# EAGLE board M_D_ext_power-with_d (EAGLE 9.6.2)
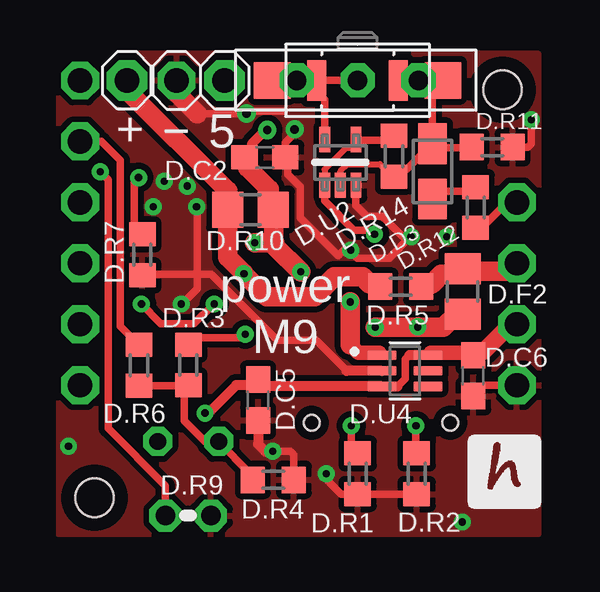
[diagram p0: board, top side]
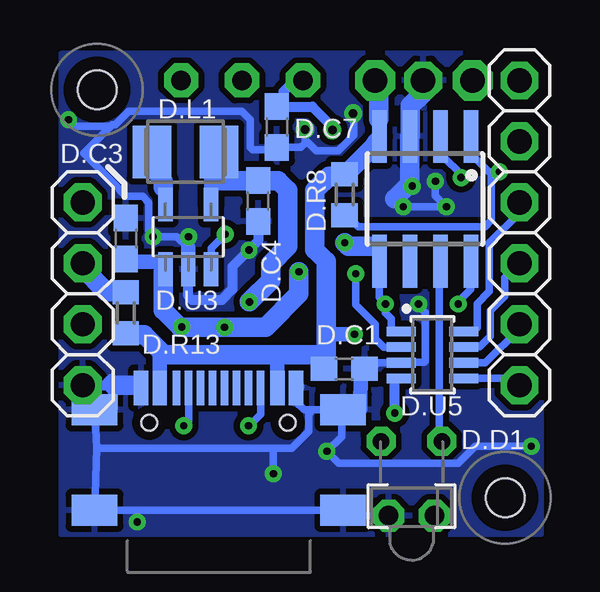
[diagram p1: board, bottom side, seen from below]

No outline drawn. Coordinates in mm, seen from the top.
Copper layers (1*16): Top 0.035mm / dielectric 1.5mm / Bottom 0.035mm
Design rules "default *": minimum track width 10mil, minimum drill 0.3mm, track to track 6mil, track to pad 6mil, pad to pad 6mil, via to via 10mil, smd to smd 10mil, copper to edge 15mil, drill to drill 15mil, minimum pad ring 10mil, minimum via ring 8mil, stop-mask expansion 4mil, vias tented up to drill 14mil, thermal gap 10mil
Holes 1.6 mm at 2,2 19,19
tRestrict: area 18,18 to 20,20; area 1,1 to 3,3
bRestrict: area 1,1 to 3,3; area 18,18 to 20,20

## Footprints (pad centres in the part's own frame; a part is rotated, then mirrored left to right if it is on the bottom)
C0603 = smd 1.1 x 1: 1 -0.85,0; 2 0.85,0
LED_1.8 = drill 0.7 octagon: 1 -1.27,-0.4; 2 1.27,-0.4
SHOTKY_2.8 = smd 1.7 x 1.2: A -1.15,0; K 1.15,0
R0805 = smd 1.3 x 1.5: 1 -0.95,0; 2 0.95,0
1X06 = drill 1.016 pad 1.575 octagon: 1 -6.35,0; 2 -3.81,0; 3 -1.27,0; 4 1.27,0; 5 3.81,0; 6 6.35,0
1X04 = drill 1.016 pad 1.575 octagon: 1 -3.81,0; 2 -1.27,0; 3 1.27,0; 4 3.81,0
L3230M = smd 1.6 x 2.2: 1 -1.4,0; 2 1.4,0
1X-03-2 = drill 1.016 pad 1.676 octagon: 1 -2.016,0; 3 2.048,0 | drill 1.016 pad 1.575 octagon: 2 -0.016,0
SWITCH = drill 0.8 pad 1.422 octagon: P$1 2.54,0; P$2 0,0; P$3 -2.54,0 | smd 0.8 x 1.7: P$4 -1.7,0; P$5 1.7,0 | smd 1.524 x 1.524: P$6 -3.556,0; P$7 3.556,0
R0603 = smd 1 x 1.1: 1 -0.85,0; 2 0.85,0
THERM = drill 0.813 octagon: 1 -0.953,0; 2 0.953,0
SOP8 = smd 0.6 x 2.2: 1 -1.905,-2.6; 2 -0.635,-2.6; 3 0.635,-2.6; 4 1.905,-2.6; 5 1.905,2.6; 6 0.635,2.6; 7 -0.635,2.6; 8 -1.905,2.6
DCK0005A_M = smd 1.05 x 0.45: 1 -0.95,0.65; 2 -0.95,0; 3 -0.95,-0.65; 4 0.95,-0.65; 5 0.95,0.65
SOT32-5 = smd 0.6 x 1.4: BP 0.95,1.35; GND 0,-1.35; SHDN 0.95,-1.35; VIN -0.95,-1.35; VOUT -0.95,1.35
SOT65P210X110-6N = smd 1.19 x 0.4: 1 -0.96,0.65; 2 -0.96,0; 3 -0.96,-0.65; 4 0.96,-0.65; 5 0.96,0; 6 0.96,0.65
SOT23-8 = smd 0.4 x 1.2: 1 -0.975,-1.3; 2 -0.325,-1.3; 3 0.325,-1.3; 4 0.975,-1.3; 5 0.975,1.3; 6 0.325,1.3; 7 -0.325,1.3; 8 -0.975,1.3
USB-C = smd 0.6 x 1.45: A1B12 -3.235,3.825; A4B9 -2.46,3.825; B1A12 3.215,3.825; B4A9 2.44,3.825 | smd 0.3 x 1.45: A5 -1.26,3.825; A6 -0.26,3.825; A7 0.24,3.825; A8 1.24,3.825; B5 1.74,3.825; B6 0.74,3.825; B7 -0.76,3.825; B8 -1.76,3.825 | smd 1.9 x 1.3: SH1 -5.18,2.91; SH2 -5.18,-1.27; SH3 5.18,-1.27; SH4 5.18,2.91 | hole 0.65: 2.88,2.38; -2.9,2.38

## Placement (x,y rotation side)
D.C1  4u7  [C0603]  8.7,7.38 180 bottom
D.C2  4u7  [C0603]  9.1,16.18 180 top
D.C3  4u7  [C0603]  17.81,12.8 270 bottom
D.C4  10u  [C0603]  12.29,14.36 90 bottom
D.C5  100n  [C0603]  8.81,6.07 90 top
D.C6  100n  [C0603]  17.78,7.09 90 top
D.C7  100n  [C0603]  11.51,17.45 90 bottom
D.D1  LED_1.8  [LED_1.8]  5.9,3.95 180 bottom
D.D3  SHOTKY_2.8 or another diode  [SHOTKY_2.8]  16.08,15.6 90 top
D.F2  1.1A  [R0805]  17.34,10.6 90 top
D.J2  [1X06]  1.4,13.04 90 bottom
D.J3  [1X04]  19.6,10.5 270 bottom
D.L1  2u2  [L3230M]  15.32,16.41 0 bottom
D.LIPOL  PINHEAD-1X3-2  [1X-03-2]  5.4,19.39 180 top
D.ON/OFF/RESET  SWITCH  [SWITCH]  12.96,19.39 0 top
D.R1  5k1  [R0603]  12.96,3 270 top
D.R2  5k1  [R0603]  15.42,3 270 top
D.R3  3k3  [R0603]  5.91,7.54 90 top
D.R4  5k1  [R0603]  9.45,2.74 180 top
D.R5  0R  [R0603]  14.76,10.79 0 top
D.R6  10k  [R0603]  3.85,7.52 90 top
D.R7  I=1800/R  [R0603]  4,12.12 90 top
D.R8  10k  [R0603]  8.69,14.63 90 bottom
D.R9  TERM_10K  [THERM]  5.9,1.25 180 top
D.R10  0.1  [R0805]  8.5,14 180 top
D.R11  390k  [R0603]  18.57,16.61 0 top
D.R12  100k  [R0603]  17.88,14.1 90 top
D.R13  0R  [R0603]  17.81,9.7 90 bottom
D.R14  0R  [R0603]  14.48,16.23 90 top
D.U1  CN3083  [SOP8]  5.33,14.45 180 bottom
D.U2  SN74AUP1G80  [DCK0005A_M]  12.24,15.98 90 top
D.U3  LM3671_3.3  [SOT32-5]  15.2,12.87 0 bottom
D.U4  LM66100DCKR  [SOT65P210X110-6N]  14.94,7.29 0 top
D.U5  [SOT23-8]  5.03,7.95 270 bottom
U$1  USB-C  [USB-C]  13.93,2.75 0 bottom

## Library data of the parts
D.C1-D.C7 = rcl; SPICEPREFIX: C
D.D1 D.D3 D.ON/OFF/RESET D.R9 D.U1 D.U5 U$1 = hugo
D.F2 D.R1-D.R8 D.R10-D.R14 = rcl; SPICEPREFIX: R
D.J2 D.J3 D.LIPOL = pinhead2
D.L1 = rcl; SPICEPREFIX: L
D.U2 = SN74AUP1G80DCKR; COPYRIGHT: Copyright (C) 2026 Ultra Librarian. All rights reserved.; DATASHEET: https://www.ti.com/lit/gpn/sn74aup1g80; DESCRIPTION: Low-Power Single Postitive-Edge-Triggered D-Type Flip-Flop 5-SC70 -40 to 85; MANUFACTURER_NAME: Texas Instruments; MANUFACTURER_PART_NUMBER: SN74AUP1G80DCKR; REFDES: RefDes; TYPE: TYPE
D.U3 = !stavebnice03
D.U4 = LM66100DCKR; AVAILABILITY: In Stock; CHECK_PRICES: https://www.snapeda.com/parts/LM66100DCKR/Texas+Instruments/view-part/?ref=eda; DESCRIPTION: 1.5-V to 5.5-V, 1.5-A, 0.5-µA IQ ideal diode with integrated FET; MF: Texas Instruments; MP: LM66100DCKR; PACKAGE: SOT-SC70-6 Texas Instruments; PRICE: None; SNAPEDA_LINK: https://www.snapeda.com/parts/LM66100DCKR/Texas+Instruments/view-part/?ref=snap

## Nets
5V: D.C1.2 D.LIPOL.1 D.R3.2 D.R8.2 D.R13.1 D.U1.4 U$1.A4B9 U$1.B4A9
CHRG: D.D1.2 D.R3.1 D.R4.2 D.R6.1
GND: D.C1.1 D.C2.1 D.C3.1 D.C4.1 D.C5.1 D.C6.1 D.C7.1 D.J3.4 D.LIPOL.2 D.R1.2 D.R2.2 D.R4.1 D.R7.1 D.R9.1 D.R11.2 D.U1.3 D.U2.3 D.U3.GND D.U4.2 D.U5.3 U$1.A1B12 U$1.B1A12 U$1.SH1 U$1.SH2 U$1.SH3 U$1.SH4
IN+: D.C2.2 D.C3.2 D.C7.2 D.F2.1 D.ON/OFF/RESET.P$2 D.ON/OFF/RESET.P$3 D.ON/OFF/RESET.P$4 D.ON/OFF/RESET.P$6 D.R10.1 D.U1.5 D.U1.8 D.U2.5 D.U3.VIN D.U5.1
IN-: D.LIPOL.3 D.R5.1 D.R10.2 D.U5.2
N$2: D.L1.1 D.U3.VOUT
N$3: D.D1.1 D.U1.7
N$4: D.R1.1 U$1.B5
N$5: D.D3.A D.R12.2
N$6: D.R2.1 U$1.A5
N$7: D.R7.2 D.U1.2
N$8: D.R8.1 D.R9.2 D.U1.1
N$9: D.R14.2 D.U2.1 D.U2.4 D.U3.SHDN
N$10: D.D3.K D.ON/OFF/RESET.P$1 D.ON/OFF/RESET.P$5 D.ON/OFF/RESET.P$7 D.R11.1 D.R14.1 D.U2.2
PA1: D.J2.3 D.U5.7
PA2: D.J2.4 D.U5.8
PA3: D.J2.5 D.R6.2
PA5-1: D.J3.1 D.R12.1
SCL: D.J2.1 D.U5.5
SDA: D.J2.2 D.U5.6
VCC: D.C5.2 D.C6.2 D.J3.3 D.U4.3 D.U4.6 D.U5.4
VCC1: D.C4.2 D.L1.2 D.U3.BP D.U4.1
VOPT: D.F2.2 D.J3.2 D.R5.2 D.R13.2

## Tracks (layer width: path | path; a pad name or v marks a point on that pad's centre or on a via)
5V  (via drill 0.3)
  Top 0.305: D.R3.2 6.19,8.66 8.13,8.66 v8.28,8.81
  Bottom 0.254: 16.28,7.96 16.2,7.96
  Bottom 0.305: 9.4,8.81 9.45,8.76
  Bottom 0.61: 11.49,7.02 U$1.B4A9 11.49,7.87 11.4,7.96 | D.R8.2 8.79,15.48 8.87,15.4 | U$1.A4B9 16.39,7.84 16.28,7.96 | 7.26,17.76 7.24,17.74 D.U1.4 7.44,16.85 7.44,16.67 | v8.28,8.81 9.4,8.81
  Bottom 0.813: D.R8.2 8.63,15.48 7.44,16.67 | 8.87,15.4 9.34,15.4 9.93,14.81 9.93,12.32 9.45,11.84 9.45,8.76 9.45,7.97 9.46,7.96 9.65,7.96 | D.C1.2 9.64,7.46 9.65,7.96 | 9.65,7.96 11.4,7.96 16.2,7.96 17.04,8.8 17.75,8.8 D.R13.1 | 7.26,17.76 7.26,19.21 D.LIPOL.1
CHRG
  Top 0.305: D.R4.2 8.6,2.9 7.05,4.45 7.05,4.35 D.D1.2 7.16,4.34 6.61,4.34 5.74,5.2 5.74,6.59 | D.R6.1 5.69,6.67 5.69,6.59 5.74,6.59 | 5.74,6.59 5.82,6.59 D.R3.1
  Bottom 0.305: D.D1.2
GND  (via drill 0.3, 0.35)
  Top 0.305: v11.65,3 11.65,2.77 12.27,2.15 D.R1.2 D.R2.2 | 6.29,11.3 6.29,10.71 5.65,10.07 v5.61,10.07 | 6.29,11.3 6.29,14.12 v6.25,14.12 | v10.34,17.35 10.34,17.18 9.95,16.79 D.C2.1 | D.C2.1 10.05,16.08 10.05,15.47 10.57,14.96 10.57,13.66 12.15,12.08 12.51,12.44 12.65,12.3 | v15.19,12.88 15.16,12.88 14.28,11.99 12.95,11.99 12.65,12.3 | 6.27,18.01 v8.33,18.01 8.43,18.11 9.91,18.11 | v9.42,3.94 10.15,3.94 10.3,3.79 D.R4.1 | D.R7.1 4.03,11.3 6.29,11.3 | v12.67,12.32 12.65,12.3 | 12.5,7.29 11.23,8.56 9.6,8.56 6.86,11.3 6.29,11.3 | D.C6.1 18.23,6.69 D.J3.4 | 15.11,12.88 v15.19,12.88 | v20.19,17.75 20.19,16.75 20.05,16.61 D.R11.2 | v15.19,12.88 15.19,13.01 | D.C2.1 10.08,16.05 | v15.19,12.88 14.84,12.88 13.98,13.74 13.34,13.74 12.89,14.18 D.U2.3
  Top 0.406: D.C5.1 8.81,4.23 9.11,3.94 v9.42,3.94 | D.U4.2 12.5,7.29
  Top 0.61: 5.44,18.84 5.42,18.89 D.LIPOL.2
  Top 0.813: 6.27,18.01 5.44,18.84
  Bottom 0.305: 11.65,4.07 18.99,4.07 19.01,4.09 | U$1.SH4 8.92,5.71 9.45,5.71 9.33,5.59 8.81,5.59 | U$1.SH1 19.01,4.09 | 19.01,4.09 U$1.SH2 U$1.SH3 8.64,1.25 D.R9.1 | 11.65,3.13 v11.65,3 | v11.65,3 11.63,2.97 | v11.65,3 11.65,4.07 | 8.04,5.68 8.13,5.59 8.81,5.59 | 8.01,7.22 D.C1.1 7.55,7.38 7.3,7.62 D.U5.3 6.31,7.64 5.37,7.64 5.32,7.7 5.32,9.73 5.65,10.06 5.65,10.07 v5.61,10.07 | 6.59,14.46 v6.25,14.12 v4.45,14.12 4.9,14.58 v4.9,15.19 | U$1.B1A12 10.71,6.01 10.37,5.66 U$1.SH4 | 11.65,4.07 10.89,4.07 10.19,4.78 10.19,5.49 10.02,5.66 U$1.SH4 | 18.44,17.48 19.91,17.48 v20.19,17.75 | 15.2,12.41 15.68,12.88 16.59,12.88 16.82,13.12 16.84,13.12 16.84,14.3 17.11,14.57 17.8,14.57 18.06,14.82 18.06,14.86 19.56,16.36 18.44,17.48 | v0.91,4.14 3.24,4.14 3.95,3.44 8.93,3.44 v9.42,3.94 8.81,4.55 8.81,5.59 | 18.44,17.48 18.36,17.55 18.24,17.55 17.68,18.11 12.98,18.11 12.62,17.75 12.62,16.61 12.52,16.51 11.6,16.51 D.C7.1 10.51,16.6 10.34,16.77 | 10.46,17.48 v10.34,17.35 10.34,16.77 | v8.33,18.01 8.31,17.99 8.31,17.1 8.95,16.46 9.88,16.46 10.26,16.85 10.34,16.77
  Bottom 0.406: 18.37,6.98 18.5,6.85 | 18.5,6.85 18.66,6.69 | U$1.A1B12 17.16,6.6 17.33,6.77 17.41,6.69 | 18.66,6.69 D.J3.4 19.6,6.25 | 18.66,6.69 18.31,6.69 | 18.5,6.85 18.34,6.68 18.34,5.71 | D.C4.1 12.29,12.71 v12.67,12.32 13.36,11.63 13.36,10.68 13.8,10.24 15.04,10.24 15.2,10.4 D.U3.GND
  Bottom 0.61: 8.81,5.84 8.87,5.79 U$1.SH4 8.74,5.79 | 19.6,6.25 U$1.SH1 | U$1.B1A12 10.66,6.63 | D.U1.3 5.97,18.23 | 8.04,5.68 8.01,7.22 | D.U3.GND 15.2,12.41 | D.LIPOL.2 5.42,18.86
  Bottom 0.813: 18.31,6.69 17.41,6.69 | 6.59,14.46 5.97,15.09 D.U1.3 5.94,17.08 5.94,18.33 5.42,18.86
  other vias: 5.87,14.99 16.67,12.88 17.32,0.99
  pour Top (isolate 0.254): 0.5,20.5 0.5,0.5 20.5,0.5 20.5,20.5
  pour Bottom (isolate 0.254, rank 3): 0.5,20.5 20.5,20.5 20.5,0.5 0.5,0.5
IN+  (via drill 0.3, 0.35)
  Top 0.305: v3.96,10.07 4.77,9.26 6.13,9.26 v6.99,10.07 | v9.2,17.33 9.13,17.33 | 8.55,16.49 D.C2.2 | 11.32,19.33 D.ON/OFF/RESET.P$4 D.ON/OFF/RESET.P$3 D.ON/OFF/RESET.P$6 | D.ON/OFF/RESET.P$2 11.39,19.39 11.32,19.33 | 11.32,19.33 11.08,19.09 11.59,18.57 D.U2.5
  Top 0.406: 9.13,17.33 8.55,16.74 8.55,16.49
  Top 0.508: 14.79,9.1 15.32,9.1
  Top 0.61: v8.68,12.62 9.52,12.62
  Top 0.813: D.R10.1 9.27,14.18 9.27,14.86 8.38,15.75 8.38,16.06 D.C2.2 | D.R10.1 9.54,14 | D.R10.1 9.47,13.97 9.47,12.62 v8.68,12.62 | 17.35,9.6 17.34,9.61 D.F2.1 17.08,9.65 16.54,9.1 15.45,9.1 | v15.47,9.12 15.45,9.1 | 15.45,9.1 15.32,9.1 14.83,9.1 | v13.69,9.1 14.79,9.1 | 9.52,12.62 9.52,12.49 v10.59,11.42
  Bottom 0.305: D.U3.VIN 16.15,11.82 | D.C3.2 17.59,11.74 17.6,11.82 | 13.51,9.28 v13.69,9.1 | D.U5.1 6.56,8.93 6.74,9.1 6.74,9.47 6.99,9.72 v6.99,10.07 7.24,10.36 D.U1.5 | v3.96,10.07 3.96,10.16 3.43,10.68 D.U1.8
  Bottom 0.406: D.ON/OFF/RESET.P$3 10.77,19.39 11.23,18.93 11.23,18.58 D.C7.2 10.03,18.3 9.2,17.47 v9.2,17.33
  Bottom 0.508: 7.37,12.47 7.24,12.6 | 7.24,12.42 7.19,12.47
  Bottom 0.61: 7.24,12.45 D.U1.5 7.24,12.42 7.24,12.6 | 17.6,11.82 16.15,11.82 | D.U3.VIN 16.25,11.42 | v9.2,17.33 9.27,17.4
  Bottom 0.813: v8.68,12.62 8.53,12.47 7.37,12.47 | 16.25,11.42 16.25,9.82 15.54,9.1 v13.69,9.1 11.98,9.1 10.59,10.49 v10.59,11.42
IN-  (via drill 0.3)
  Top 0.813: D.LIPOL.3 3.35,18.98 7.55,14.79 D.R10.2 7.55,13.49 7.54,13.49 7.54,12.03 8.23,11.35 v8.23,11.33 9.18,10.38 11.17,10.38 11.99,11.2 13.17,11.2 13.45,10.92 13.78,10.92 D.R5.1
  Bottom 0.305: D.U5.2 6.34,8.27 7.05,8.27 7.41,8.63 7.41,9.23 8.23,10.04 v8.23,11.33
N$2
  Bottom 0.305: 16.25,14.93 16.15,14.83 D.U3.VOUT
  Bottom 0.61: D.L1.1 16.72,15.62 16.25,15.16
  Bottom 0.813: 16.25,15.16 16.25,14.93
N$3
  Bottom 0.305: D.U1.7 4.75,11.8 4.75,4.47 D.D1.1
N$4  (via drill 0.3)
  Top 0.305: D.R1.1 12.69,4.14 v12.69,5
  Bottom 0.305: U$1.B5 12.19,5.48 12.67,5 v12.69,5
N$5
  Top 0.305: D.R12.2 17.47,14.78 16.41,14.78 D.D3.A
N$6  (via drill 0.3)
  Top 0.305: D.R2.1 15.39,3.88 v15.39,5
  Bottom 0.305: U$1.A5 15.19,5.2 v15.39,5
N$7  (via drill 0.3)
  Top 0.305: v3.83,15.34 3.66,15.16 3.66,13.31 D.R7.2
  Bottom 0.305: D.U1.2 4.57,16.93 4.57,16.21 3.83,15.48 v3.83,15.34
N$8  (via drill 0.3)
  Top 0.305: D.R9.2 4.95,2.51 2.56,4.89 2.56,15.26 v2.24,15.59
  Bottom 0.305: D.U1.1 3.4,17.03 3.4,16.32 2.67,15.59 v2.24,15.59 2.42,15.59 2.57,15.43 2.57,13.55 2.83,13.3 8.13,13.3 8.61,13.78 D.R8.1
N$9  (via drill 0.3)
  Top 0.254: D.U2.1 11.59,15.69 12.47,16.57 12.89,16.57
  Top 0.305: 14.37,16.97 D.R14.2 14.3,16.9 12.92,16.9 D.U2.4 12.89,16.57 | v13.66,12.98 v13.66,12.99 13.5,13.15 12.81,13.15 11.59,14.37 D.U2.1
  Bottom 0.305: D.U3.SHDN 14.25,12.39 v13.66,12.98
N$10
  Top 0.254: D.R14.1 14.41,15.38 13.89,15.9 12.55,15.9 12.24,15.6 D.U2.2
  Top 0.305: D.ON/OFF/RESET.P$1 D.ON/OFF/RESET.P$5 15.85,19.39 16.08,19.16 D.D3.K | D.ON/OFF/RESET.P$1 15.36,19.35 | D.ON/OFF/RESET.P$1 D.ON/OFF/RESET.P$7 | 17.49,16.84 D.R11.1 17.7,16.59 16.23,16.59 D.D3.K | 14.1,15.38 D.R14.1 14.48,15.65 14.63,15.49 14.63,15.65 14.66,15.68 15.01,15.68 D.D3.K
PA1
  Bottom 0.305: D.U5.7 3.71,8.29 3.05,8.29 2.62,8.73 2.62,9.78 2.01,10.39 2.01,11.16 D.J2.3
PA2
  Bottom 0.305: D.J2.4 1.4,13.88 2.65,12.63 2.65,10.6 3.17,10.08 3.17,9.08 3.32,8.93 D.U5.8
PA3
  Top 0.305: D.R6.2 3.07,9.15 3.07,16.07 2.29,16.85 D.J2.5
PA5-1
  Top 0.305: D.R12.1 18.03,13.4 18.28,13.4 19.19,14.31 D.J3.1
SCL
  Bottom 0.305: D.U5.5 1.69,6.97 D.J2.1
SDA
  Bottom 0.305: D.J2.2 1.4,9.04 2.82,7.62 D.U5.6
VCC  (via drill 0.3)
  Top 0.305: 14.62,6.63 14.95,6.97 14.95,7.77 15.12,7.94 | D.U4.6 16,8.05 | D.C6.2 19.07,9.23 D.J3.3
  Top 0.406: v6.6,5.53 6.74,5.53 7.9,6.69 8.59,6.69 D.C5.2 9.09,6.64 D.U4.3 14.62,6.63 | D.U4.6 15.12,7.94
  Top 0.61: D.J3.3 19.4,9.23 18.21,8.05 16,8.05
  Bottom 0.305: 6.6,6.8 6.43,6.97 D.U5.4
  Bottom 0.406: v6.6,5.53 6.6,6.8
VCC1  (via drill 0.3)
  Top 0.305: D.U4.1 13.87,8.04
  Top 0.61: v12.65,10.16 | 13.87,8.04 12.99,8.04 12.65,8.38
  Top 0.813: v12.65,10.16 12.65,8.38
  Bottom 0.406: D.U3.BP 14.25,14.45 | D.C4.2 12.13,15.21
  Bottom 0.508: 14.25,16.07 D.L1.2
  Bottom 0.61: D.U3.BP 14.25,16.07
  Bottom 0.813: v12.65,10.16 11.76,11.05 11.76,11.76 11.05,12.47 11.05,14.81 11.45,15.21 12.13,15.21 | 14.07,16.25 D.L1.2 13.92,15.9 | 13.92,15.9 13.89,15.88 | 13.92,15.9 13.92,15.21 D.C4.2
VOPT
  Top 0.813: D.J3.2 19.27,11.44 17.45,11.44 D.F2.2 17.09,11.3 16.45,11.3 16.07,10.92 15.73,10.92 D.R5.2
  Bottom 0.813: D.R13.2 17.84,10.59 18.61,10.59 19.6,11.58 D.J3.2

## Text on the board
tPlace: + | − | 5 | power / M9